# Altium PCB AT32_FOC.pcbdoc (part 1 of 2)
Units mil, origin at the board's own origin, x right, y up, seen from the top; angles counter-clockwise.
Board outline 11370.16 x 13019.92 mil, 2 copper layers (Top Layer, Bottom Layer); 154 components, 92 nets, 477 pads, 506 vias.
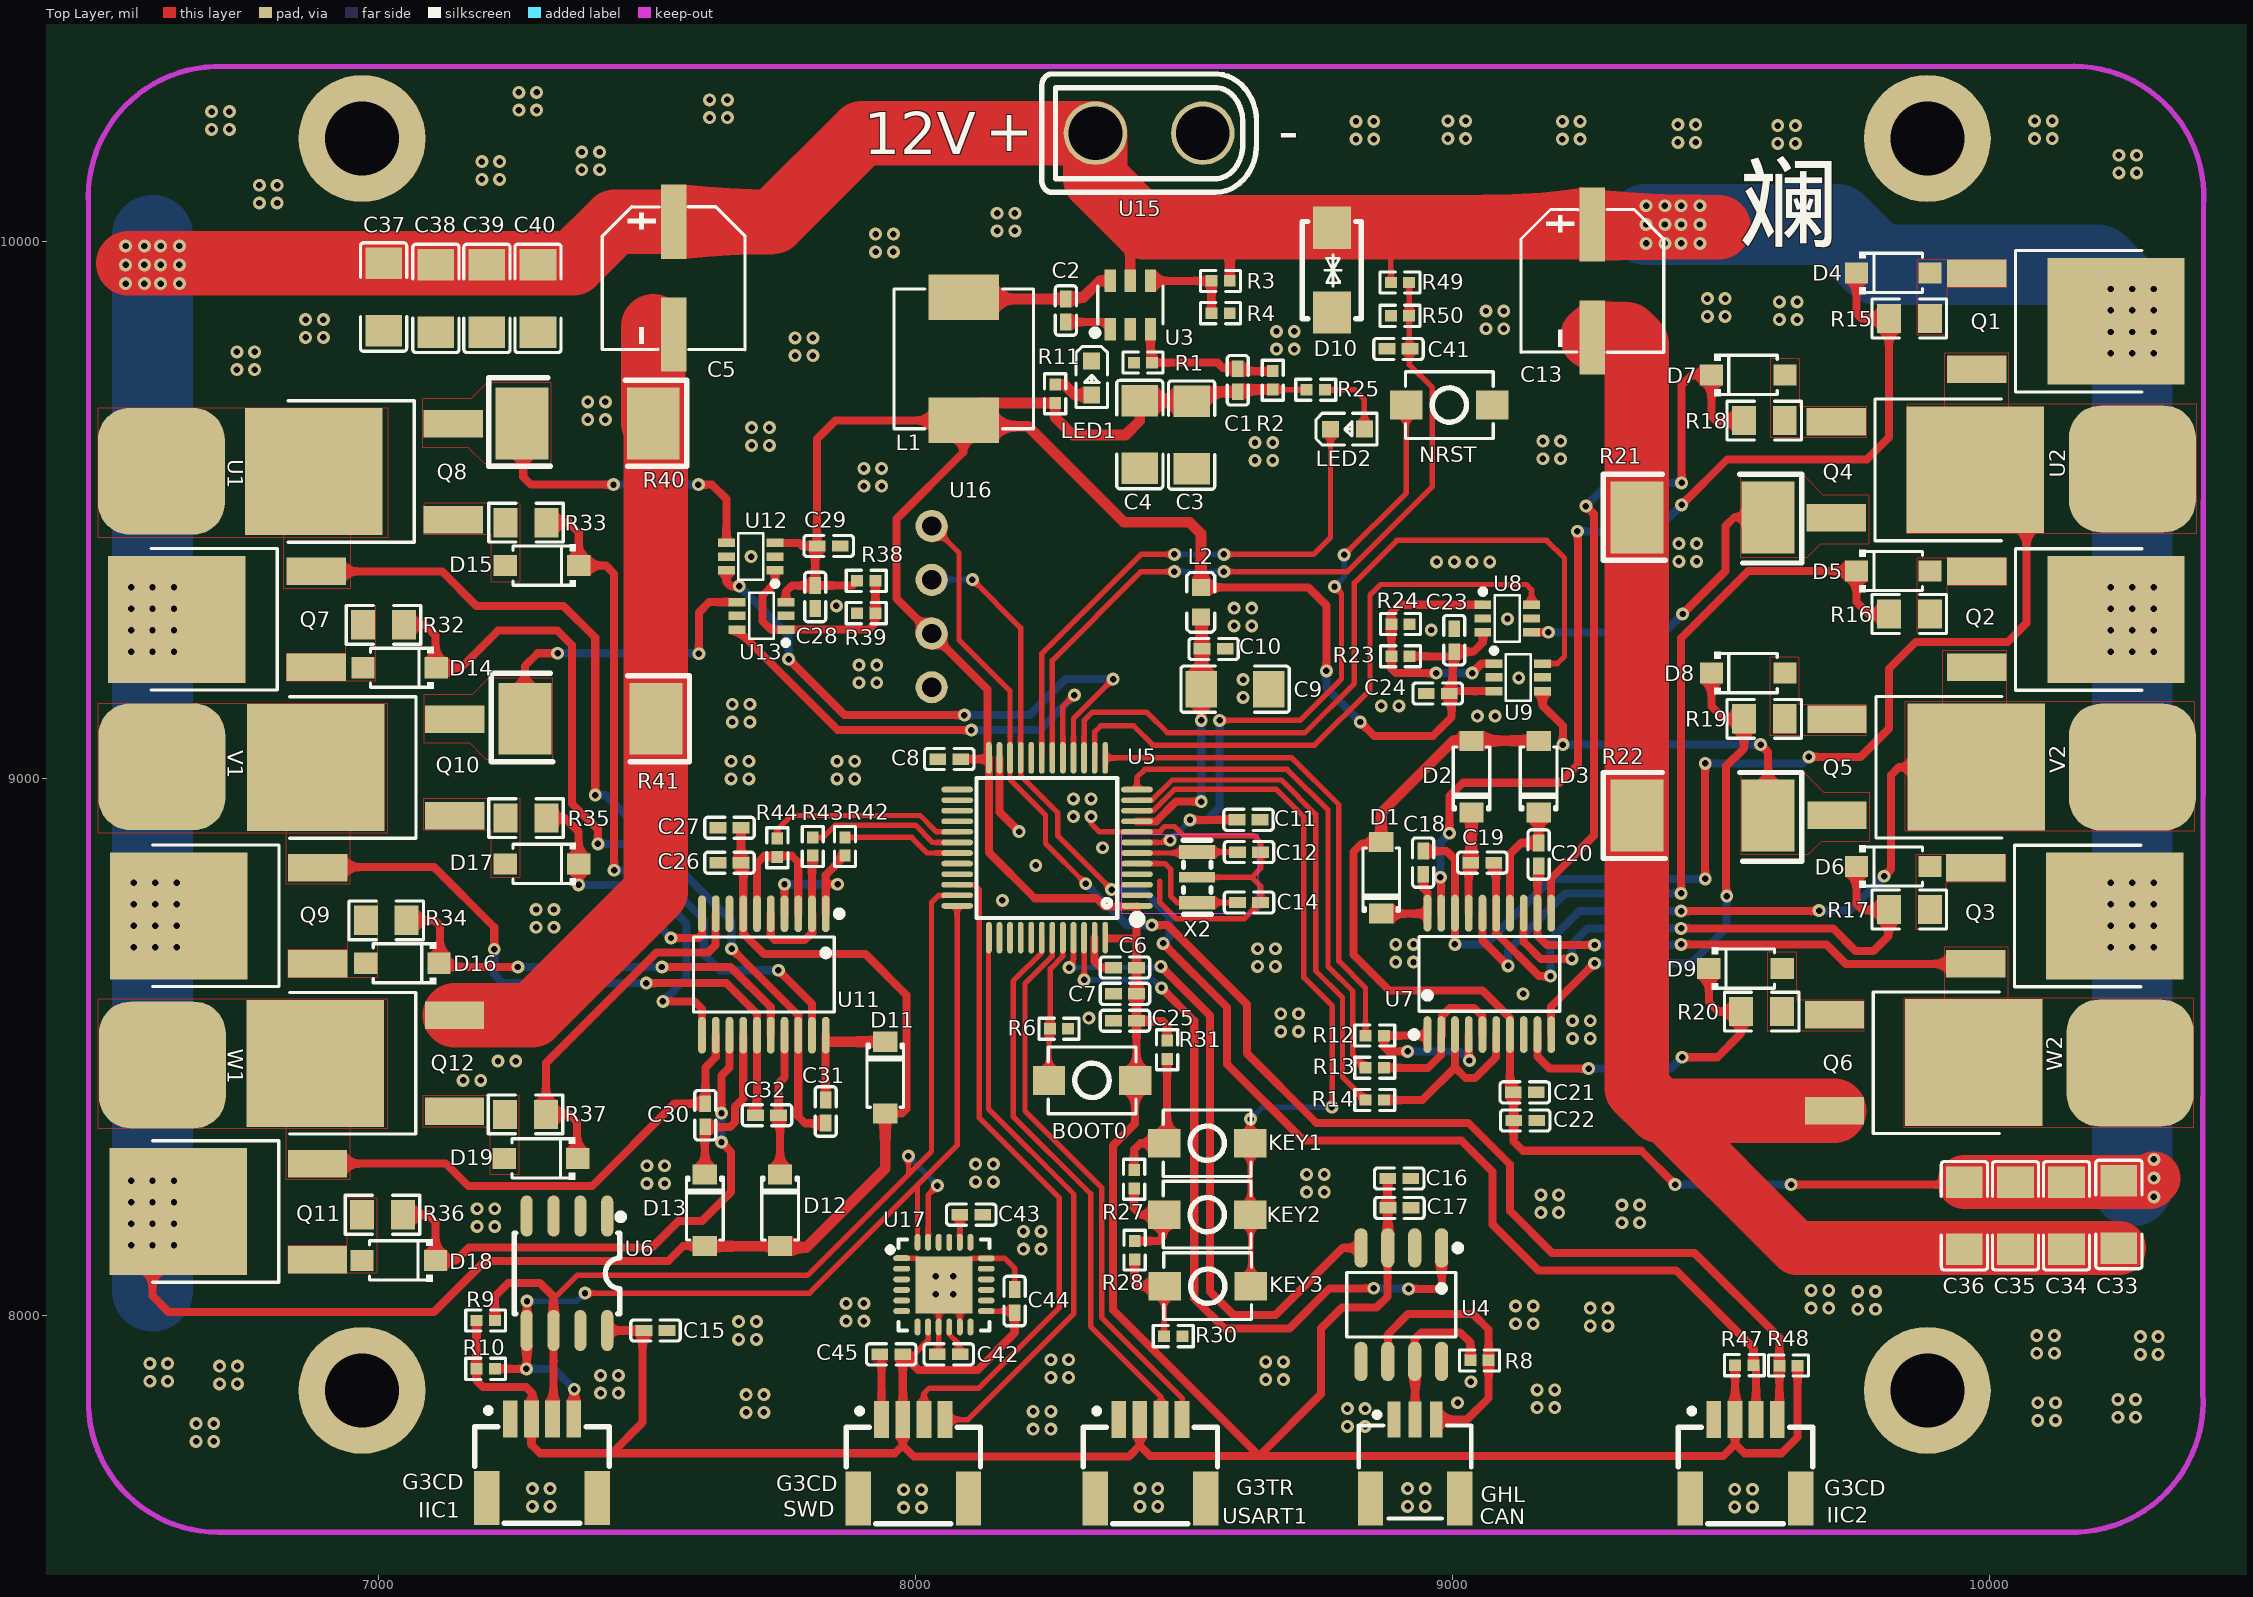
[diagram p0: Top Layer view]
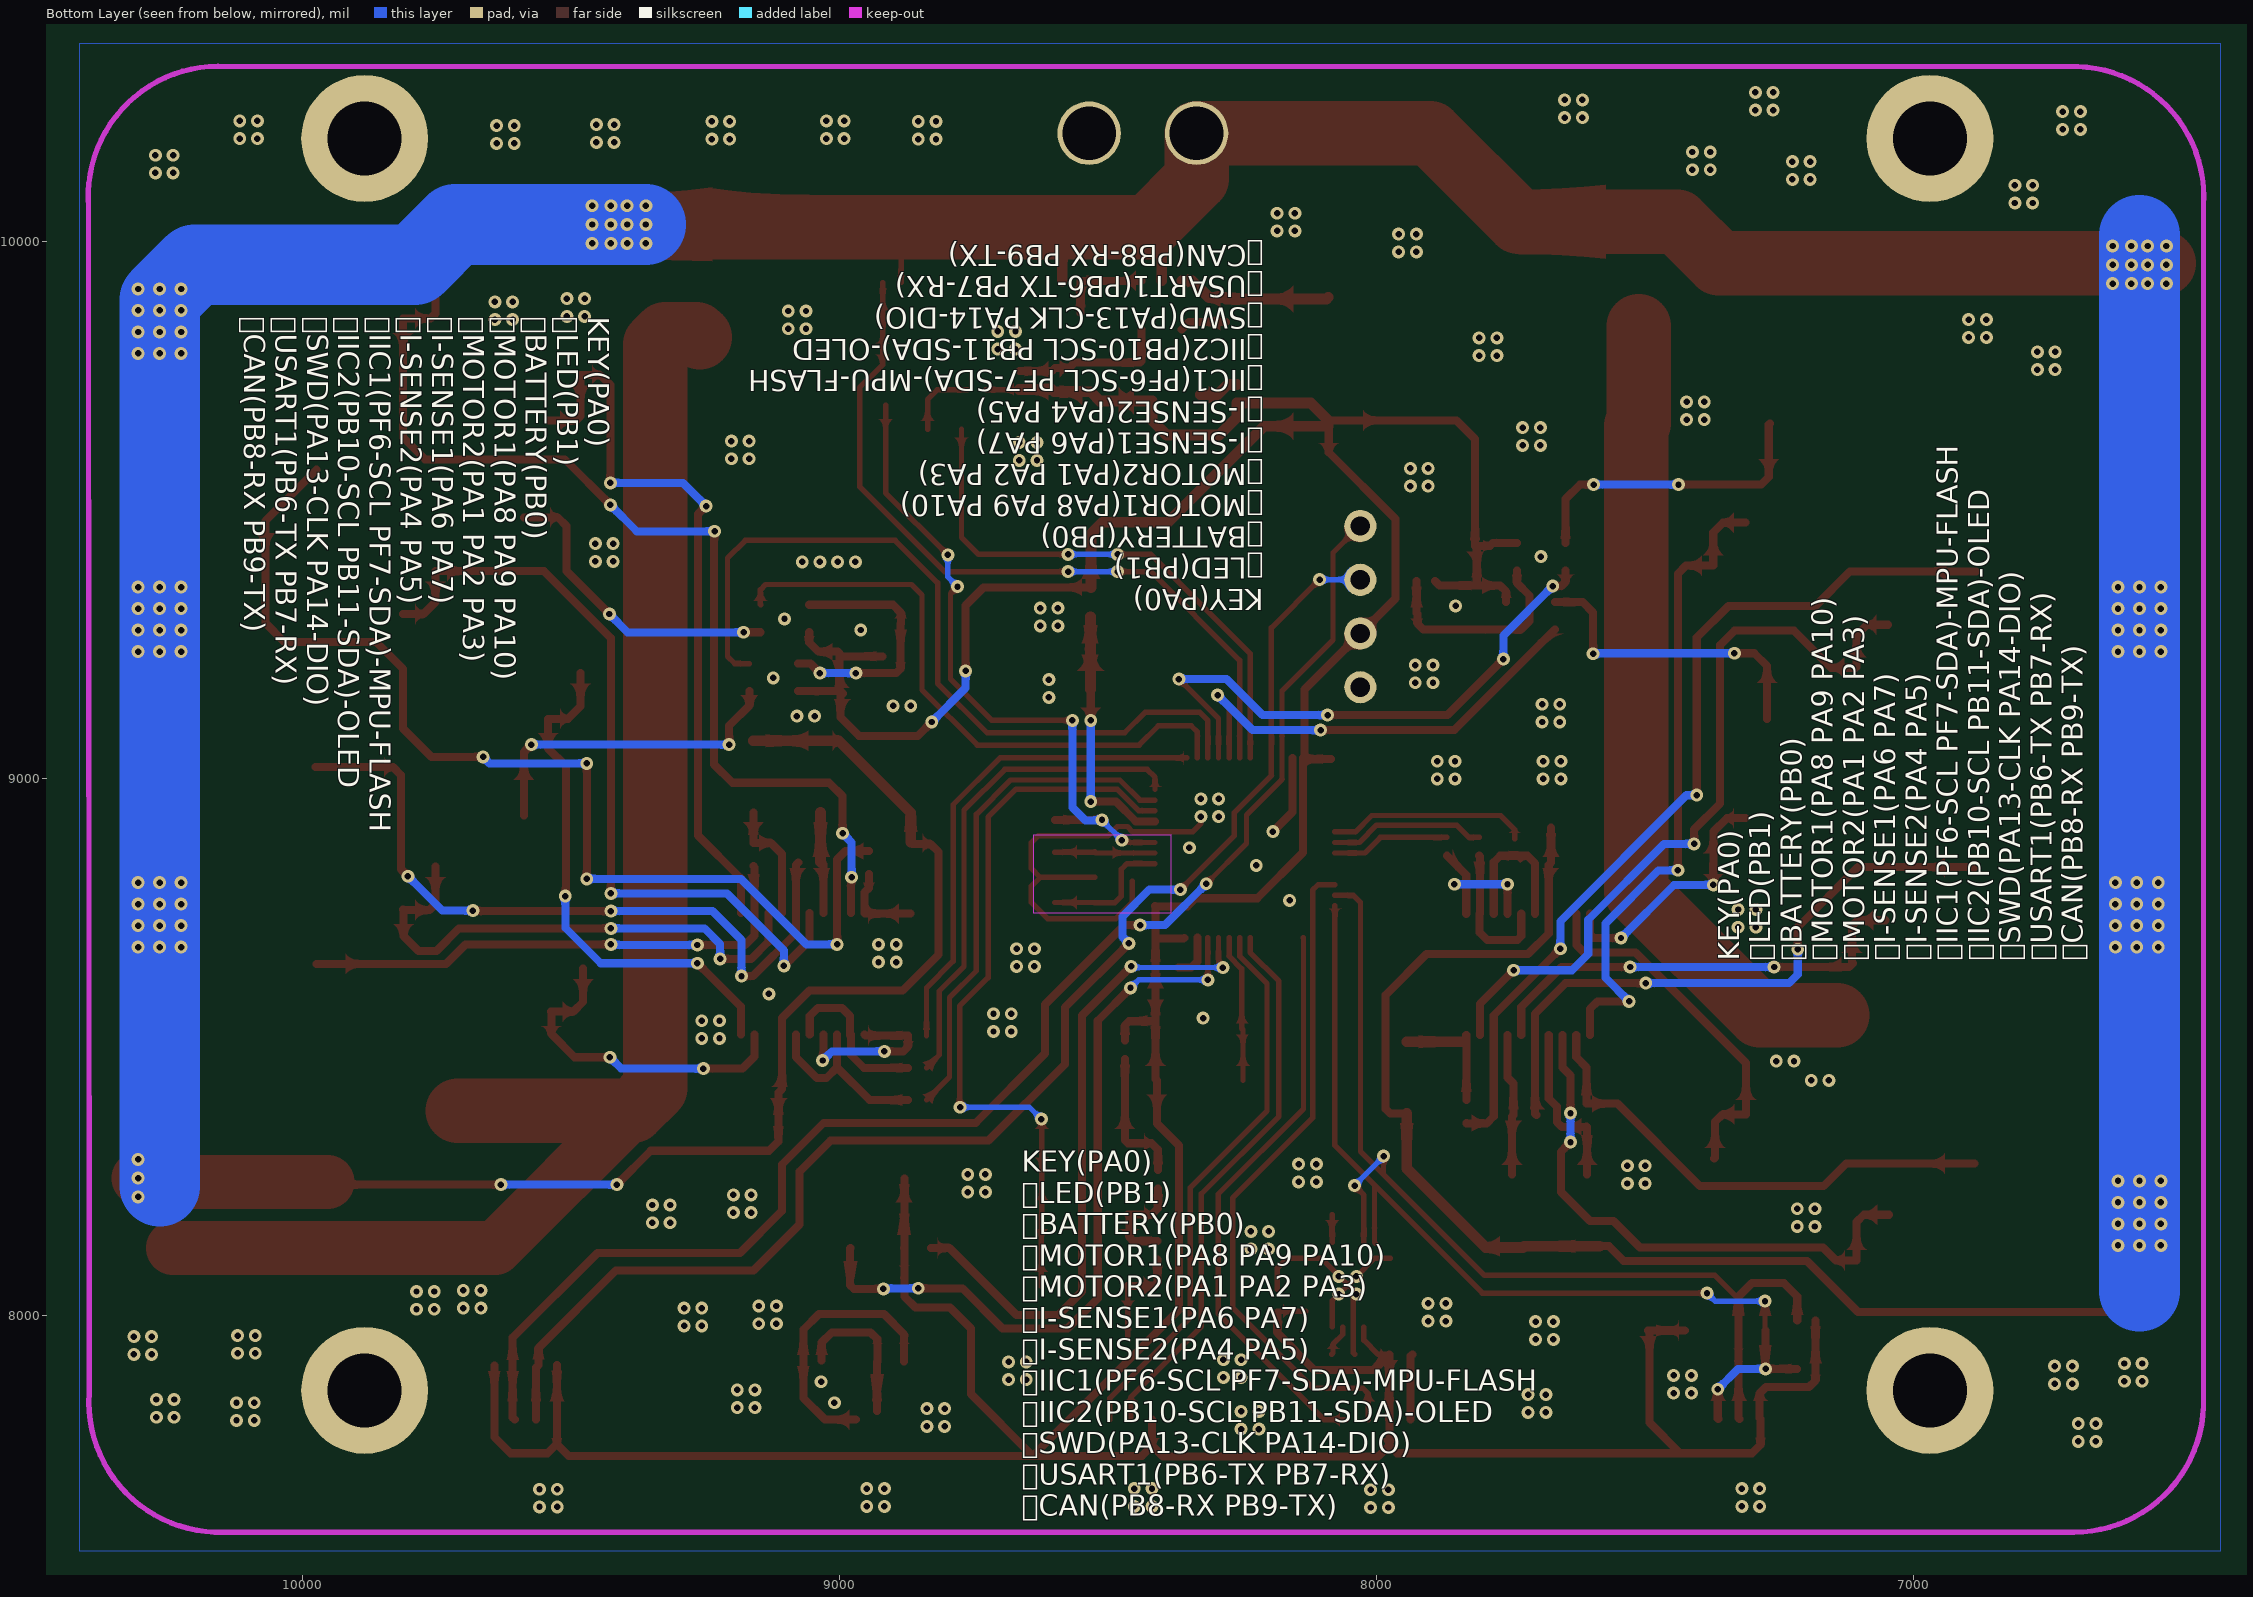
[diagram p1: Bottom Layer view, seen from below]

## Layer stack, top to bottom
Top Layer: signal copper (thickness not stored)
Dielectric: dielectric 12.6, FR-4, Dk 4.8
Bottom Layer: signal copper (thickness not stored)

## Board outline
14120.16,2750 2750,2750 2750,15769.92 14120.16,15769.92

## Components (designator, comment, footprint, x,y, rotation, side; value= is the part's Value field where it differs from the comment)
BOOT0 "K2-1807SN-A3DW-06" SW-SMD_L4.0-W2.9-LS5.0 8328.85,8437.92 r0 top
C1 "CL10C220JB8NNNC" C0402 8600.08,9740.92 r90 top
C2 "CL10B223KB8NNNC" C0402 8280.08,9870.92 r90 top
C3 "CL21A226MAQNNNE_C45783" C1206 8514.24,9638.92 r90 top
C4 "CL21A226MAQNNNE_C45783" C1206 8417.66,9639.92 r90 top
C5 "PM101M025E077PTR" CAP-SMD_BD6.3-L6.6-W6.6-LS7.2-FD 7550.08,9930.92 r270 top
C6 "0603B104K500NT" C0402 8390.08,8647.92 r0 top
C7 "0603B104K500NT" C0402 8390.08,8598.92 r0 top
C8 "0603B104K500NT" C0402 8063.08,9035.92 r0 top
C9 "CL10A106KP8NNNC" C1206 8595.08,9165.92 r180 top
C10 "0603B104K500NT" C0402 8555.08,9240.92 r180 top
C11 "0603B104K500NT" C0402 8620.08,8922.88 r180 top
C12 "CL10C220JB8NNNC" C0402 8621.08,8862.83 r0 top
C13 "PM101M025E077PTR" CAP-SMD_BD6.3-L6.6-W6.6-LS7.2-FD 9260.08,9925.92 r270 top
C14 "CL10C220JB8NNNC" C0402 8621.08,8768.92 r180 top
C15 "CC0603KRX7R9BB104" C0402 7516.28,7972.37 r0 top
C16 "CL10A106KP8NNNC" C0402 8900.55,8255.25 r180 top
C17 "0603B104K500NT" C0402 8900.97,8200.46 r180 top
C18 "CL10A105KB8NNNC" C0402 8945.08,8843.22 r270 top
C19 "CL10A105KB8NNNC" C0402 9055.08,8843.22 r180 top
C20 "CL10A105KB8NNNC" C0402 9160.08,8858.22 r90 top
C21 "CL10A105KB8NNNC" C0402 9134.28,8415.52 r180 top
C22 "CC0603KRX7R9BB104" C0402 9135.08,8363.22 r180 top
C23 "CC0603KRX7R9BB104" C0402 9002.91,9257.24 r90 top
C24 "CC0603KRX7R9BB104" C0402 8972.08,9157.92 r180 top
C25 "0603B104K500NT" C0402 8390.08,8548.92 r0 top
C26 "CL10A105KB8NNNC" C0402 7653.93,8843.09 r0 top
C27 "CC0603KRX7R9BB104" C0402 7653.93,8908.09 r0 top
C28 "CC0603KRX7R9BB104" C0402 7813.56,9337.6 r270 top
C29 "CC0603KRX7R9BB104" C0402 7838.56,9432.6 r0 top
C30 "CL10A105KB8NNNC" C0402 7608.93,8373.09 r270 top
C31 "CL10A105KB8NNNC" C0402 7833.08,8379.92 r90 top
C32 "CL10A105KB8NNNC" C0402 7723.93,8373.09 r0 top
C33 "GRM31CR61E476ME44L" C1206 10240.08,8188.42 r270 top
C34 "GRM31CR61E476ME44L" C1206 10142.58,8185.92 r270 top
C35 "GRM31CR61E476ME44L" C1206 10047.58,8185.92 r270 top
C36 "GRM31CR61E476ME44L" C1206 9952.58,8185.92 r270 top
C37 "GRM31CR61E476ME44L" C1206 7010.08,9895.92 r270 top
C38 "GRM31CR61E476ME44L" C1206 7107.58,9893.42 r270 top
C39 "GRM31CR61E476ME44L" C1206 7202.58,9893.42 r270 top
C40 "GRM31CR61E476ME44L" C1206 7297.58,9893.42 r270 top
C41 "0603B104K500NT" C0402 8899.08,9799.28 r0 top
C42 "CC0603KRX7R9BB104" C0402 8062.08,7927.92 r180 top
C43 "CC0603KRX7R9BB104" C0402 8104.08,8187.92 r180 top
C44 "CC0603KRX7R9BB104" C0402 8184.69,8027.11 r90 top
C45 "CC0603KRX7R9BB104" C0402 7955.05,7927.92 r0 top
CAN "AFC10-S03QCA-00" CONN-SMD_AFC10-S03QCA-00 8930.08,7732.92 r180 top
D1 "DSK34_C41029" SOD-123_L2.8-W1.8-LS3.7-RD 8867.18,8814.92 r90 top
D2 "DSK34_C41029" SOD-123_L2.8-W1.8-LS3.7-RD 9035.08,9003.22 r90 top
D3 "DSK34_C41029" SOD-123_L2.8-W1.8-LS3.7-RD 9160.08,9003.22 r90 top
D4 "1N4148W_C81598" SOD-123F_L2.7-W1.6-LS3.8-RD 9820.08,9940.92 r0 top
D5 "1N4148W_C81598" SOD-123F_L2.7-W1.6-LS3.8-RD 9820.08,9385.92 r0 top
D6 "1N4148W_C81598" SOD-123F_L2.7-W1.6-LS3.8-RD 9820.08,8835.92 r0 top
D7 "1N4148W_C81598" SOD-123F_L2.7-W1.6-LS3.8-RD 9550.08,9750.92 r0 top
D8 "1N4148W_C81598" SOD-123F_L2.7-W1.6-LS3.8-RD 9550.08,9195.92 r0 top
D9 "1N4148W_C81598" SOD-123F_L2.7-W1.6-LS3.8-RD 9545.08,8645.92 r0 top
D10 "SMAJ12CA/TR13" SMA_L4.4-W2.6-LS5.0-BI 8775.08,9945.92 r90 top
D11 "DSK34_C41029" SOD-123_L2.8-W1.8-LS3.7-RD 7943.93,8443.09 r270 top
D12 "DSK34_C41029" SOD-123_L2.8-W1.8-LS3.7-RD 7748.08,8195.92 r270 top
D13 "DSK34_C41029" SOD-123_L2.8-W1.8-LS3.7-RD 7608.08,8195.92 r270 top
D14 "1N4148W_C81598" SOD-123F_L2.7-W1.6-LS3.8-RD 7040.08,9205.92 r180 top
D15 "1N4148W_C81598" SOD-123F_L2.7-W1.6-LS3.8-RD 7305.08,9395.92 r180 top
D16 "1N4148W_C81598" SOD-123F_L2.7-W1.6-LS3.8-RD 7045.08,8655.92 r180 top
D17 "1N4148W_C81598" SOD-123F_L2.7-W1.6-LS3.8-RD 7305.08,8840.92 r180 top
D18 "1N4148W_C81598" SOD-123F_L2.7-W1.6-LS3.8-RD 7038.27,8102.78 r180 top
D19 "1N4148W_C81598" SOD-123F_L2.7-W1.6-LS3.8-RD 7303.27,8292.78 r180 top
IIC1 "AFC10-S04QCA-00" CONN-SMD_AFC10-S04QCA-00 7305.08,7733.92 r0 top
IIC2 "AFC10-S04QCA-00" CONN-SMD_AFC10-S04QCA-00 9545.08,7732.92 r0 top
KEY1 "K2-1807SN-A3DW-06" SW-SMD_L4.0-W2.9-LS5.0 8543.08,8320.92 r180 top
KEY2 "K2-1807SN-A3DW-06" SW-SMD_L4.0-W2.9-LS5.0 8543.08,8187.92 r180 top
KEY3 "K2-1807SN-A3DW-06" SW-SMD_L4.0-W2.9-LS5.0 8544.08,8054.92 r180 top
L1 "0630 6.8uH" IND-SMD_L7.1-W6.6 8090.08,9780.92 r270 top
L2 "CMH160808B3R3MT" L0603 8531.61,9327.92 r90 top
LED1 "XL-1608UBC-04" LED0603-RD_BLUE 8328.08,9745.3 r270 top
LED2 "XL-1608UBC-04" LED0603-RD_BLUE 8804.21,9649.92 r0 top
NRST "K2-1807SN-A3DW-06" SW-SMD_L4.0-W2.9-LS5.0 8993.85,9694.92 r0 top
Q1 "NCE3080K" TO-252-2_L6.6-W6.1-P4.57-LS9.9-TL-CW 10105.08,9850.92 r0 top
Q2 "NCE3080K" TO-252-2_L6.6-W6.1-P4.57-LS9.9-TL-CW 10105.08,9295.92 r0 top
Q3 "NCE3080K" TO-252-2_L6.6-W6.1-P4.57-LS9.9-TL-CW 10103.08,8744.16 r0 top
Q4 "NCE3080K" TO-252-2_L6.6-W6.1-P4.57-LS9.9-TL-CW 9843.41,9574.47 r0 top
Q5 "NCE3080K" TO-252-2_L6.6-W6.1-P4.57-LS9.9-TL-CW 9845.08,9020.92 r0 top
Q6 "NCE3080K" TO-252-2_L6.6-W6.1-P4.57-LS9.9-TL-CW 9840.08,8470.92 r0 top
Q7 "NCE3080K" TO-252-2_L6.6-W6.1-P4.57-LS9.9-TL-CW 6755.08,9295.92 r180 top
Q8 "NCE3080K" TO-252-2_L6.6-W6.1-P4.57-LS9.9-TL-CW 7010.08,9570.92 r180 top
Q9 "NCE3080K" TO-252-2_L6.6-W6.1-P4.57-LS9.9-TL-CW 6758.1,8744.22 r180 top
Q10 "NCE3080K" TO-252-2_L6.6-W6.1-P4.57-LS9.9-TL-CW 7013.1,9020.12 r180 top
Q11 "NCE3080K" TO-252-2_L6.6-W6.1-P4.57-LS9.9-TL-CW 6757.68,8193.64 r180 top
Q12 "NCE3080K" TO-252-2_L6.6-W6.1-P4.57-LS9.9-TL-CW 7012.68,8469.54 r180 top
R1 "={Value}" R0402 8423.5,9773.92 r180 top
R2 "0603WAF1003T5E" R0402 8665.08,9740.92 r90 top
R3 "0603WAF2002T5E" R0402 8568.08,9925.92 r0 top
R4 "0603WAF1002T5E" R0402 8568.08,9865.92 r180 top
R6 "0603WAF1002T5E" R0402 8267.22,8533.92 r180 top
R8 "0603WAF1200T5E" R0402 9050.08,7916.66 r0 top
R9 "0603WAF1002T5E" R0402 7200.08,7990.92 r180 top
R10 "0603WAF1002T5E" R0402 7200.08,7900.92 r180 top
R11 "0603WAF5101T5E" R0402 8260.08,9715.92 r90 top
R12 "={Value}" R0402 8854.89,8521.31 r0 top
R13 "={Value}" R0402 8854.89,8461.31 r0 top
R14 "={Value}" R0402 8854.89,8401.31 r0 top
R15 "0805W8F100JT5E" R0805_NEW 9850.08,9855.92 r0 top
R16 "0805W8F100JT5E" R0805_NEW 9850.08,9305.92 r0 top
R17 "0805W8F100JT5E" R0805_NEW 9850.08,8755.92 r0 top
R18 "0805W8F100JT5E" R0805_NEW 9580.08,9665.92 r0 top
R19 "0805W8F100JT5E" R0805_NEW 9580.08,9110.92 r0 top
R20 "0805W8F100JT5E" R0805_NEW 9575.08,8565.92 r0 top
R21 "RLP25FEER005" RES-SMD_L6.4-W3.2-1 9465.08,9485.92 r0 top
R22 "RLP25FEER005" RES-SMD_L6.4-W3.2-1 9465.08,8930.92 r0 top
R23 "0603WAF1001T5E" R0402 8902.91,9227.24 r180 top
R24 "0603WAF1001T5E" R0402 8902.91,9287.24 r0 top
R25 "0603WAF5101T5E" R0402 8745.08,9723.38 r0 top
R27 "0603WAF1002T5E" R0402 8407.08,8253.92 r90 top
R28 "0603WAF1002T5E" R0402 8408.08,8121.92 r90 top
R30 "0603WAF1002T5E" R0402 8480.08,7961.92 r180 top
R31 "0603WAF1002T5E" R0402 8468.52,8494.92 r90 top
R32 "0805W8F100JT5E" R0805_NEW 7010.08,9285.92 r180 top
R33 "0805W8F100JT5E" R0805_NEW 7275.08,9475.92 r180 top
R34 "0805W8F100JT5E" R0805_NEW 7015.08,8735.92 r180 top
R35 "0805W8F100JT5E" R0805_NEW 7275.08,8925.92 r180 top
R36 "0805W8F100JT5E" R0805_NEW 7008.27,8187.78 r180 top
R37 "0805W8F100JT5E" R0805_NEW 7274.42,8374.54 r180 top
R38 "0603WAF1001T5E" R0402 7908.56,9367.6 r0 top
R39 "0603WAF1001T5E" R0402 7908.56,9307.6 r180 top
R40 "RLP25FEER005" RES-SMD_L6.4-W3.2-1 7390.08,9660.92 r180 top
R41 "RLP25FEER005" RES-SMD_L6.4-W3.2-1 7395.08,9110.92 r180 top
R42 "={Value}" R0402 7868.93,8873.09 r270 top
R43 "={Value}" R0402 7808.93,8873.09 r270 top
R44 "={Value}" R0402 7743.08,8870.92 r270 top
R47 "0603WAF1002T5E" R0402 9542.92,7907.92 r180 top
R48 "0603WAF1002T5E" R0402 9625.18,7907.13 r0 top
R49 "0603WAF5101T5E" R0402 8902.08,9922.92 r0 top
R50 "0603WAF5101T5E" R0402 8902.08,9860.92 r180 top
SWD "AFC10-S04QCA-00" CONN-SMD_AFC10-S04QCA-00 7996.08,7732.92 r0 top
U1 "PAD" PAD-1.5 6596.54,9571.61 r270 top
U2 "PAD" PAD-1.5 10265.08,9575.92 r270 top
U3 "MT2492" SOT-23-6_L2.9-W1.6-P0.95-LS2.8-BL 8400.08,9880.92 r0 top
U4 "SIT65HVD230DR" SOP-8_L4.9-W3.9-P1.27-LS6.0-BL 8904.39,8020.4 r180 top
U5 "AT32F415CBT7_C528427" LQFP-48_L7.0-W7.0-P0.50-LS9.0-BL 8245.08,8870.92 r90 top
U6 "AT24C02C-SSHM-T" SOIC-8_L5.0-W4.0-P1.27-LS6.0-BL 7351.45,8078.87 r180 top
U7 "EG2133_C190343" TSSOP-20_L6.5-W4.4-P0.65-LS6.4-BL 9068.23,8636.19 r0 top
U8 "TP181A1-CR" SC70-6_L2.1-W1.3-P0.65-LS2.3-BL 9101.31,9297.57 r270 top
U9 "TP181A1-CR" SC70-6_L2.1-W1.3-P0.65-LS2.3-BL 9122.08,9187.92 r270 top
U11 "EG2133_C190343" TSSOP-20_L6.5-W4.4-P0.65-LS6.4-BL 7718,8635.04 r180 top
U12 "TP181A1-CR" SC70-6_L2.1-W1.3-P0.65-LS2.3-BL 7693.56,9412.6 r90 top
U13 "TP181A1-CR" SC70-6_L2.1-W1.3-P0.65-LS2.3-BL 7713.56,9302.6 r90 top
U15 "XT30" XT-30 8435.08,10200.92 r0 top
U16 "0.91OLED-4P-IIC模块" OLED-0.91-2.54*4P-IIC 8691.38,9360.92 r0 top
U17 "MPU-6050" QFN-24_L4.0-W4.0-P0.50-BL-EP2.7 8053.2,8057.7 r270 top
USART1 "AFC10-S04QCA-00" CONN-SMD_AFC10-S04QCA-00 8437.4,7732.92 r0 top
V1 "PAD" PAD-1.5 6597.44,9021.61 r90 top
V2 "PAD" PAD-1.5 10265.08,9020.92 r270 top
W1 "PAD" PAD-1.5 6598.35,8466.61 r270 top
W2 "PAD" PAD-1.5 10261.09,8470.25 r90 top
X2 "CSTCE8M00G52-R0" OSC-SMD_3P-L3.2-W1.3-P1.2-L 8524.53,8815.92 r90 top

## Footprints (in the part's own frame and the unit in brackets; to place one, negate y for a bottom-side part, rotate by r counter-clockwise, add the part's x,y. Pads: shape width x height; smd on the part's side, far side on the other; paste and mask are expansions set on the pad)
C0402 [mm]
  rect 0.79x0.54 smd: 1(-0.545,0) 2(0.545,0)
  silkscreen extent -1.17,-0.5 1.17,0.5
C1206 [mm]
  rect 1.485x1.728 smd: 1(-1.593,0) 2(1.593,0)
  silkscreen extent -2.56,-1.09 2.56,1.09
CAP-SMD_BD6.3-L6.6-W6.6-LS7.2-FD [mm]
  rect 3.5x1.2 smd: 1(-2.67,0) 2(2.67,0)
  silkscreen extent -3.38,-3.38 3.38,3.38
CONN-SMD_AFC10-S03QCA-00 [mm]
  rect 0.6x1.71 smd: 1(1,-1.87) 2(0,-1.87) 3(-1,-1.87)
  rect 1.2x2.55 smd: 4(-2.11,1.87) 5(2.11,1.87)
  silkscreen extent -2.66,-2.22 2.66,2.81
CONN-SMD_AFC10-S04QCA-00 [mm]
  rect 0.7x1.75 smd: 1(-1.5,1.87) 2(-0.5,1.87) 3(0.5,1.87) 4(1.5,1.87)
  rect 1.2x2.55 smd: 5(-2.61,-1.87) 6(2.61,-1.87)
  silkscreen extent -3.18,-3.06 3.17,2.4
IND-SMD_L7.1-W6.6 [mm]
  rect 2.15x3.32 smd: 1(-2.913,0) 2(2.913,0)
  silkscreen extent -3.3,-3.3 3.3,3.3
L0603 [mm]
  rect 0.8x0.864 smd: 1(-0.7,0) 2(0.7,0)
  silkscreen extent -1.42,-0.65 1.41,0.67
LED0603-RD_BLUE [mm]
  rect 0.8x0.8 smd: 1(-0.8,-0.004) 2(0.799,0.004)
  silkscreen extent -1.49,-0.75 1.39,0.76
LQFP-48_L7.0-W7.0-P0.50-LS9.0-BL [mm]
  oval 0.27x1.5 smd: 1(-2.75,-4.25) 2(-2.25,-4.25) 3(-1.75,-4.25) 4(-1.25,-4.25) 5(-0.75,-4.25) 6(-0.25,-4.25) 7(0.25,-4.25) 8(0.75,-4.25) 9(1.25,-4.25) 10(1.75,-4.25) 11(2.25,-4.25) 12(2.75,-4.25) 25(2.75,4.25) 26(2.25,4.25) 27(1.75,4.25) 28(1.25,4.25) 29(0.75,4.25) 30(0.25,4.25) 31(-0.25,4.25) 32(-0.75,4.25) 33(-1.25,4.25) 34(-1.75,4.25) 35(-2.25,4.25) 36(-2.75,4.25)
  oval 1.5x0.27 smd: 13(4.25,-2.75) 14(4.25,-2.25) 15(4.25,-1.75) 16(4.25,-1.25) 17(4.25,-0.75) 18(4.25,-0.25) 19(4.25,0.25) 20(4.25,0.75) 21(4.25,1.25) 22(4.25,1.75) 23(4.25,2.25) 24(4.25,2.75) 37(-4.25,2.75) 38(-4.25,2.25) 39(-4.25,1.75) 40(-4.25,1.25) 41(-4.25,0.75) 42(-4.25,0.25) 43(-4.25,-0.25) 44(-4.25,-0.75) 45(-4.25,-1.25) 46(-4.25,-1.75) 47(-4.25,-2.25) 48(-4.25,-2.75)
  silkscreen extent -3.59,-4.46 3.3,3.34
OLED-0.91-2.54*4P-IIC [mil]
  round 60 hole 35.8: 1(-661.1,-191.3) 2(-661.1,-91.3) 3(-661.1,8.7) 4(-661.1,108.7)
OSC-SMD_3P-L3.2-W1.3-P1.2-L [mm]
  rect 0.65x1.7 smd: 1(-1.2,0) 3(1.2,0)
  rect 0.5x1.7 smd: 2(0,0)
  silkscreen extent -1.75,-0.66 1.75,0.66
PAD-1.5 [mm]
  rrect50% 6x6 smd: 1(0,0)
QFN-24_L4.0-W4.0-P0.50-BL-EP2.7 [mm]
  oval 0.28x0.8 smd: 1(-1.25,-2) 2(-0.75,-2) 3(-0.25,-2) 4(0.25,-2) 5(0.75,-2) 6(1.25,-2) 13(1.25,2) 14(0.75,2) 15(0.25,2) 16(-0.25,2) 17(-0.75,2) 18(-1.242,2)
  oval 0.8x0.28 smd: 7(2,-1.25) 8(2,-0.75) 9(2,-0.25) 10(2,0.25) 11(2,0.75) 12(2,1.25) 19(-2,1.25) 20(-2,0.75) 21(-2,0.25) 22(-2,-0.25) 23(-2,-0.75) 24(-2,-1.25)
  rect 2.7x2.7 smd: 25(0.012,0)
  silkscreen extent -2.14,-2.79 2.16,2.15
R0402 [mm]
  rect 0.566x0.54 smd: 1(-0.433,0) 2(0.433,0)
  silkscreen extent -0.94,-0.5 0.94,0.5
R0805_NEW [mil]
  rect 44.59x54.21 smd: 1(-38.04,0) 2(38.04,0)
  silkscreen extent -69,-36 69,36
RES-SMD_L6.4-W3.2-1 [mm]
  rect 2.5x3.4 smd: 1(-3.1,0) 2(3.1,0)
  silkscreen extent -4.69,-2.16 4.69,2.03
SC70-6_L2.1-W1.3-P0.65-LS2.3-BL [mm]
  rect 0.4x0.8 smd: 1(-0.65,-1.15) 2(0,-1.15) 3(0.65,-1.15) 4(0.65,1.15) 5(0,1.15) 6(-0.65,1.15)
  silkscreen extent -1.4,-1.27 1.1,0.59
SMA_L4.4-W2.6-LS5.0-BI [mm]
  rect 2x1.8 smd: 1(-2,0) 2(2,0)
  silkscreen extent -2.3,-1.4 2.3,1.4
SOD-123_L2.8-W1.8-LS3.7-RD [mm]
  rect 0.95x1.15 smd: 1(-1.692,0) 2(1.692,0)
  silkscreen extent -1.58,-0.87 1.41,0.87
SOD-123F_L2.7-W1.6-LS3.8-RD [mm]
  rect 1.1x1 smd: 1(-1.735,0) 2(1.735,0)
  silkscreen extent -1.6,-1 1.38,1
SOIC-8_L5.0-W4.0-P1.27-LS6.0-BL [mil]
  oval 22.38x76.78 smd: 1(-75,-106.5) 2(-25,-106.5) 3(25,-106.5) 4(75,-106.5) 5(75,106.5) 6(25,106.5) 7(-25,106.5) 8(-75,106.5)
  silkscreen extent -106,-111 98,75
SOP-8_L4.9-W3.9-P1.27-LS6.0-BL [mm]
  oval 0.63x1.865 smd: 1(-1.905,-2.682) 2(-0.635,-2.682) 3(0.635,-2.682) 4(1.905,-2.682) 5(1.905,2.682) 6(0.635,2.682) 7(-0.635,2.682) 8(-1.905,2.682)
  silkscreen extent -2.82,-2.83 2.58,1.52
SOT-23-6_L2.9-W1.6-P0.95-LS2.8-BL [mil]
  rect 20.95x42.2 smd: 1(-37.4,-45.24) 2(0,-45.24) 3(37.4,-45.24) 4(37.4,45.24) 5(0,45.24) 6(-37.4,45.24)
  silkscreen extent -72,-57 61,35
SW-SMD_L4.0-W2.9-LS5.0 [mm]
  rect 1.53x1.36 smd: 1(-2.035,0) 2(2.035,0)
  silkscreen extent -2.08,-1.58 2.08,1.58
TO-252-2_L6.6-W6.1-P4.57-LS9.9-TL-CW [mm]
  rect 2.8x1.3 smd: 1(-3.292,2.273) 3(-3.292,-2.273)
  rect 6.5x6 smd: 2(3.292,0)
  silkscreen extent -1.46,-3.35 4.51,3.34
TSSOP-20_L6.5-W4.4-P0.65-LS6.4-BL [mil]
  oval 14.33x68.58 smd: 1(-115.16,-113.03) 2(-89.57,-113.03) 3(-63.98,-113.03) 4(-38.39,-113.03) 5(-12.79,-113.03) 6(12.8,-113.03) 7(38.39,-113.03) 8(63.98,-113.03) 9(89.57,-113.03) 10(115.16,-113.03) 11(115.16,113.03) 12(89.57,113.03) 13(63.98,113.03) 14(38.39,113.03) 15(12.8,113.03) 16(-12.79,113.03) 17(-38.39,113.03) 18(-63.98,113.03) 19(-89.57,113.03) 20(-115.16,113.03)
  silkscreen extent -146,-119 131,70
XT-30 [mm]
  round 3 hole 2.54: 1(-2.54,0) 2(2.54,0)
  silkscreen extent -5.07,-2.8 5.07,2.8

## Free pads (board coordinates)
  round 236.22 hole 137.8: 1(6970.08,7860.92) 1(6970.08,10190.92)
  round 236.22 hole 137.8 copper offset -0.01,0: 1(9883.47,7860.92)
  round 236.22 hole 137.8 copper offset -0.01,0.01: 1(9883.47,10190.91)

## Via types
v1: diameter 24.02, hole 12.01, Top Layer to Bottom Layer, 506 vias

## Nets (pads, with @x,y where several pads share a name; then routed paths per layer and width w, separated by ;. In a path a pad name is that pad's centre, name@x,y a point inside that pad or via, vN(x,y) a via of type N, cw(c..) or ccw(c..) an arc to the next point about the centre after c; other vN are vias at no path point)
3V3: BOOT0.2 C1.1 C3.2 C4.2 C6.2 C7.2 C8.2 C15.1 C16.2 C17.2 C23.1 C24.1 C25.2 C28.1 C29.1 C44.1 C45.2 IIC1.2 IIC2.2 L1.2 L2.2 R2.1 R9.2 R10.2 R11.1 R23.1 R25.1 R31.2 R38.1 R47.2 R48.2 SWD.2 U4.3 U5.1 U5.24 U5.48 U6.8 U8.3 U9.3 U12.3 U13.3 U16.2 U17.8 U17.13 USART1.2 | length 10476
  Top Layer w10: C45.2@7976.51,7927.92 7997.08,7927.92 8023.67,7954.52 U17.8@8023.67,7978.96 ; U17.13@8131.94,8008.49 8181.85,8008.49 C44.1@8184.69,8005.65 ; R2.1@8665.08,9723.88 8665.58,9723.38 R25.1@8728.04,9723.38
  Top Layer w15: R9.2@7183.04,7990.92 R10.2@7183.04,7900.92 7183.04,7878.96 7195.08,7866.92 7275.08,7866.92 7287.08,7854.92 7287.08,7809.23 IIC1.2@7285.39,7807.55 7285.39,7759.61 7301.08,7743.92 7435.08,7743.92 ; U6.8@7426.45,7972.37 C15.1@7494.82,7972.37 7492.08,7969.63 7492.08,7800.92 7435.08,7743.92 ; U12.3@7738.84,9438.19 7783.81,9438.19 7789.08,9432.92 C29.1@7816.79,9432.92 ; U13.3@7758.84,9328.19 7758.84,9347.68 7770.08,9358.92 7813.42,9358.92 C28.1@7813.56,9359.07 ; R38.1@7891.52,9367.6 7882.98,9359.07 C28.1@7813.56,9359.07 ; C8.2@8084.54,9035.92 U5.24@8134.49,9035.92 ; C44.1@8184.69,8005.65 8184.69,7967.53 8116.08,7898.92 8005.51,7898.92 C45.2@7976.51,7927.92 7976.51,7806.67 SWD.2@7976.39,7806.55 7976.39,7758.61 ; U5.48@8358.08,8703.31 8359.08,8702.31 8411.54,8702.31 ; 8411.54,8756.92 8411.54,8702.31 ; U5.1@8412.4,8762.65 8411.67,8761.92 8351.92,8761.92 8336.92,8776.92 8222.08,8776.92 8136.81,8862.19 U5.24@8136.81,9038.24 U5.24@8134.49,9035.92 ; USART1.2@8417.71,7806.55 8417.71,7758.29 ; R31.2@8468.52,8511.96 8468.52,8540.48 8461.08,8547.92 8412.54,8547.92 C25.2@8411.54,8548.92 ; L2.2@8531.61,9355.48 8731.52,9355.48 8765.08,9321.92 v1(8765.08,9199.92) ; v1(8828.08,9104.92) 8854.08,9078.92 8963.08,9078.92 8997.95,9113.79 C24.1@8997.95,9162.33 ; C16.2@8879.09,8255.25 U4.3@8879.09,8126.3 ; U4.3@8879.39,8126.01 U4.3@8879.09,8126.3 ; R23.1@8919.95,9227.24 8994.37,9227.24 C23.1@9000.08,9232.95 ; C24.1@8993.54,9157.92 C24.1@8997.95,9162.33 ; U8.3@9056.04,9271.98 9056.04,9252.88 9038.94,9235.78 C23.1@9002.91,9235.78 C23.1@9000.08,9232.95 ; U9.3@9076.81,9162.33 C24.1@8997.95,9162.33 ; IIC2.2@9525.39,7806.55 IIC2.2@9525.88,7807.03 ; R47.2@9525.88,7907.92 IIC2.2@9525.88,7807.03 ; R48.2@9642.22,7907.13 9642.22,7774.06 9612.08,7743.92 9543.08,7743.92 9525.88,7761.12 ; 7435.08,7743.92 7961.7,7743.92 7976.39,7758.61 ; C28.1@7813.56,9359.07 7813.56,9429.07 C29.1@7817.1,9432.6 C29.1@7816.79,9432.92 ; C29.1@7816.79,9432.92 7816.79,9631.63 7851.4,9666.24 L1.2@8090.08,9666.24 8089.08,9665.24 8089.08,9606.92 7965.08,9482.92 7965.08,9334.82 U16.2@8030.28,9269.62 8134.49,9165.41 U5.24@8134.49,9035.92 ; 7976.39,7758.61 7997.08,7737.92 8397.34,7737.92 8417.71,7758.29 ; C25.2@8411.54,8548.92 C7.2@8411.54,8598.92 C6.2@8411.54,8647.92 8411.54,8702.31 ; C25.2@8411.54,8548.92 8411.54,8440.49 BOOT0.2@8408.97,8437.92 8408.97,8357.82 8368.08,8316.92 8368.08,8010.92 8640.08,7738.92 ; 8417.71,7758.29 8437.08,7738.92 8640.08,7738.92 ; 8640.08,7738.92 9503.68,7738.92 9525.88,7761.12 ; 8640.08,7738.92 8755.08,7853.92 8755.08,7975.92 8794.08,8014.92 8858.08,8014.92 8879.09,8035.94 U4.3@8879.09,8126.3 ; C24.1@8997.95,9162.33 9000.08,9164.46 C23.1@9000.08,9232.95 ; 9525.88,7761.12 IIC2.2@9525.88,7807.03
  Top Layer w20: L2.2@8531.61,9355.48 8531.61,9455.39 8510.08,9476.92 8388.08,9476.92 8209.59,9655.41 8090.08,9655.41 L1.2@8090.08,9666.24 8122.72,9698.88 R11.1@8260.08,9698.88 8260.08,9671.92 8293.08,9638.92 8391.08,9638.92 8417.66,9665.5 C4.2@8417.66,9702.62 8513.24,9702.62 C3.2@8514.24,9701.62 8532.08,9719.46 C1.1@8600.08,9719.46 8604.5,9723.88 R2.1@8665.08,9723.88
  Bottom Layer w15: v1(8765.08,9199.92) 8765.08,9167.92 v1(8828.08,9104.92)
3V3EN: R3.1 R4.2 U3.4 | length 174
  Top Layer w15: U3.4@8437.48,9926.16 8502.8,9926.16 ; 8503.04,9925.92 8502.8,9926.16 ; R4.2@8551.04,9865.92 R3.1@8551.04,9925.92 8550.8,9926.16 8502.8,9926.16
$1N6913: LED1.2 R11.2 | length 76.1
  Top Layer w20: R11.2@8260.08,9732.96 8277.04,9732.96 8296.17,9713.83 LED1.2@8328.22,9713.83
$1N15344: LED2.2 R25.2 | length 136.3
  Top Layer w10: R25.2@8762.12,9723.38 8817.62,9723.38 8835.68,9705.32 LED2.2@8835.68,9650.06
$1N20985: KEY1.2 R27.2 R31.1 | length 258.1
  Top Layer w15: R27.2@8407.08,8270.96 8407.08,8308.92 8419.08,8320.92 KEY1.2@8462.96,8320.92 8468.52,8326.48 R31.1@8468.52,8477.88
$1N20991: KEY2.2 R27.1 R28.2 | length 195.9
  Top Layer w15: R27.1@8407.08,8236.88 8407.08,8199.92 8419.08,8187.92 KEY2.2@8462.96,8187.92 8460.08,8185.04 8460.08,8145.92 8453.12,8138.96 R28.2@8408.08,8138.96
$1N21003: KEY3.2 R28.1 R30.2 | length 195.1
  Top Layer w10: R30.2@8463.04,7961.92 8463.04,8054 KEY3.2@8463.96,8054.92
  Top Layer w15: R28.1@8408.08,8104.88 8408.08,8061.92 8415.08,8054.92 KEY3.2@8463.96,8054.92
$1N40980: C42.1 U17.10 | length 59.5
  Top Layer w10: U17.10@8063.04,7978.96 8063.04,7964.96 8081.08,7946.92 8081.08,7930.38 C42.1@8083.54,7927.92
$1N41089: C43.2 U17.20 | length 51.5
  Top Layer w10: C43.2@8082.62,8187.92 8082.73,8187.81 U17.20@8082.73,8136.44
$2N1251: D4.2 Q1.1 R15.2
$2N1356: D7.2 Q4.1 R18.2
$2N1706: D5.2 Q2.1 R16.2
$2N1723: D8.2 Q5.1 R19.2
$2N1987: D6.2 Q3.1 R17.2
$2N2004: D9.2 Q6.1 R20.2
$2N16058: D14.2 Q7.1 R32.2
$2N16063: D15.2 Q8.1 R33.2
$2N16067: D16.2 Q9.1 R34.2
$2N16072: D17.2 Q10.1 R35.2
$2N16077: D18.2 Q11.1 R36.2
$2N16082: D19.2 Q12.1 R37.2
ADC_VIN: C41.2 R49.2 R50.1 U5.18 | length 1420.3
  Top Layer w10: U5.18@8254.92,9038.24 8254.92,9219.76 8420.08,9384.92 v1(8482.08,9384.92) ; v1(8574.08,9384.92) 8804.08,9384.92 8962.08,9542.92 8962.08,9727.13 8919.54,9769.67 8919.54,9819.18 8919.12,9819.6 R50.1@8919.12,9860.92 R49.2@8919.12,9922.92
  Bottom Layer w10: v1(8482.08,9384.92) v1(8574.08,9384.92)
BOOT0: BOOT0.1 R6.2 U5.44 | length 276.4
  Top Layer w10: BOOT0.1@8248.73,8437.92 8248.73,8532.47 R6.2@8250.18,8533.92 8251.08,8534.82 8251.08,8645.46 8274.61,8668.99 U5.44@8274.61,8703.6
BS: C2.1 U3.1 | length 88.3
  Top Layer w15: C2.1@8280.08,9849.46 8348.9,9849.46 U3.1@8362.68,9835.68
CAN1_RX: U4.4 U5.45 | length 1224.9
  Top Layer w10: v1(8286.08,8647.92) 8294.29,8656.13 U5.45@8294.29,8703.6
  Top Layer w15: v1(8457.08,8649.92) 8548.08,8558.92 8548.08,8044.92 8592.08,8000.92 8670.08,8000.92 8795.16,8126.01 U4.4@8829.39,8126.01
  Bottom Layer w10: v1(8286.08,8647.92) 8455.08,8647.92 v1(8457.08,8649.92)
CAN1_TX: U4.1 U5.46 | length 1420.1
  Top Layer w10: U5.46@8313.98,8703.6 8313.98,8673.02 8314.08,8672.92 v1(8314.08,8624.92)
  Top Layer w15: v1(8458.08,8609.92) 8519.08,8548.92 8519.08,8031.92 8575.08,7975.92 8696.08,7975.92 8771.08,8050.92 v1(8853.08,8050.92) ; v1(8918.08,8049.92) 8973.08,8049.92 8980.08,8056.92 8980.08,8125.32 U4.1@8979.39,8126.01
  Bottom Layer w10: v1(8314.08,8624.92) 8443.08,8624.92 v1(8458.08,8609.92)
  Bottom Layer w15: v1(8853.08,8050.92) 8917.08,8050.92 v1(8918.08,8049.92)
CANH: CAN.2 R8.1 U4.7 | length 284
  Top Layer w15: CAN.2@8930.08,7822.54 8930.08,7914.09 U4.7@8929.39,7914.79 8929.39,7956.23 8942.08,7968.92 9014.08,7968.92 9033.04,7949.96 R8.1@9033.04,7916.66
CANL: CAN.3 R8.2 U4.6 | length 507.1
  Top Layer w15: U4.6@8879.39,7914.79 8879.39,7965.23 8917.08,8002.92 9038.08,8002.92 9067.12,7973.88 R8.2@9067.12,7916.66 9067.12,7846.96 9026.7,7806.54 CAN.3@8969.45,7806.54
EEPROM_SCL: IIC1.3 R9.1 U5.35 U6.6 U17.23 | length 1961.8
  Top Layer w10: 7326.45,8031.04 7370.34,8074.92 7799.08,8074.92 7987.08,8262.92 ; v1(7987.08,8296.92) 7987.08,8262.92 ; U17.23@8023.67,8136.44 8023.67,8224.52 v1(8041.08,8241.92) ; U5.35@8077.76,8782.34 8043.23,8782.34 8030.08,8769.19 8030.08,8305.92 7987.08,8262.92
  Top Layer w15: R9.1@7217.08,7990.96 7217.08,8035.92 7242.08,8060.92 7301.08,8060.92 7326.45,8035.55 7326.45,8031.04 U6.6@7326.45,7972.37 7326.45,7809.24 IIC1.3@7324.76,7807.55
  Bottom Layer w10: v1(7987.08,8296.92) 7987.08,8295.92 v1(8041.08,8241.92)
EEPROM_SDA: IIC1.4 R10.1 U5.36 U6.5 U17.24 | length 1821.1
  Top Layer w10: U6.5@7276.45,7972.37 7277.08,7973 v1(7277.08,8026.92) ; v1(7385.08,8041.92) 7803.08,8041.92 8003.99,8242.84 ; U17.24@8002.48,8134.92 U17.24@8003.99,8136.44 8003.99,8242.84 ; U5.36@8077.76,8762.65 8077.76,8316.6 8003.99,8242.84
  Top Layer w15: R10.1@7217.12,7900.92 v1(7276.08,7900.92) 7276.45,7901.3 U6.5@7276.45,7972.37 ; IIC1.4@7364.13,7807.55 7365.08,7808.49 v1(7365.08,7862.92)
  Bottom Layer w10: v1(7277.08,8026.92) 7370.08,8026.92 v1(7385.08,8041.92)
  Bottom Layer w15: v1(7276.08,7900.92) 7327.08,7900.92 v1(7365.08,7862.92)
FB: C1.2 R1.1 R2.2 U3.3 | length 294.2
  Top Layer w15: U3.3@8437.48,9835.68 8437.48,9776.99 R1.1@8440.54,9773.92 8562.08,9773.92 8572.08,9763.92 8598.54,9763.92 C1.2@8600.08,9762.38 8604.5,9757.96 R2.2@8665.08,9757.96
GND: C3.1 C4.1 C5.2 C6.1 C7.1 C8.1 C9.1 C10.1 C11.1 C12.2 C13.2 C14.1 C15.2 C16.1 C17.1 C21.1 C22.1 C23.2 C24.2 C25.1 C26.1 C27.1 C28.2 C29.2 C33.2 C34.2 C35.2 C36.2 C37.2 C38.2 C39.2 C40.2 C41.1 C42.2 C43.1 C44.2 C45.1 CAN.1 CAN.4 CAN.5 D10.1 IIC1.1 IIC1.5 IIC1.6 IIC2.1 IIC2.5 IIC2.6 LED1.1 NRST.2 Q6.3 Q12.3 R1.2 R4.1 R6.1 R21.1 R22.1 R24.2 R30.1 R39.2 R40.1 R41.1 R50.2 SWD.1 SWD.5 SWD.6 U3.2 U4.2 U4.8 U5.8 U5.23 U5.47 U6.1 U6.2 U6.3 U6.4 U6.7 U7.8 U8.2 U8.5 U9.2 U9.5 U11.8 U12.2 U12.5 U13.2 U13.5 U15.2 U16.1 U17.1 U17.9 U17.11 U17.18 U17.25 USART1.1 USART1.5 USART1.6 X2.2 | length 6063.3
  Top Layer w10: U17.1@7974.46,8106.91 8003.5,8106.91 v1(8037.48,8072.93) U17.25@8053.2,8057.21 ; C42.2@8040.62,7927.92 8043.36,7930.67 U17.9@8043.36,7978.96 8043.36,8047.37 U17.25@8053.2,8057.21 ; U17.11@8082.73,7978.96 8082.73,8027.68 v1(8070.48,8039.93) U17.25@8053.2,8057.21 ; C44.2@8184.69,8048.57 8184.69,8088.31 8166.4,8106.6 U17.18@8131.94,8106.6 8102.59,8106.6 U17.25@8053.2,8057.21 ; v1(8327.08,8928.92) 8327.08,8915.92 8342.55,8900.45 U5.8@8412.4,8900.45 8454.07,8900.45 8464.07,8910.45 8482.55,8910.45 8500.08,8892.92 8630.08,8892.92 8643.08,8879.92 8643.08,8863.37 C12.2@8642.54,8862.83 8642.54,8832.38 8626.08,8815.92 ; 8455.08,8808.92 8455.08,8768.92 8485.08,8738.92 8612.54,8738.92 C14.1@8642.54,8768.92 8642.54,8799.46 8626.08,8815.92 ; X2.2@8524.53,8815.92 8626.08,8815.92
  Top Layer w15: C45.1@7933.59,7927.92 7937.02,7924.49 SWD.1@7937.02,7806.55 ; U5.23@8156.5,9038.24 8156.5,8937.5 v1(8193.08,8900.92) ; U5.47@8333.66,8703.6 8333.66,8659.34 8345.08,8647.92 C6.1@8368.62,8647.92
  Top Layer w100: 9384.56,8381.44 9640.28,8125.72 C33.2@10240.08,8125.72
  Top Layer w120: Q12.3@7142.28,8559.02 7142.38,8558.92 7287.08,8558.92 7517.12,8788.97 R41.1@7517.12,9110.92 7517.12,9655.92 R40.1@7512.12,9660.92 7512.12,9841.92 ; C13.2@9260.07,9820.81 9266.19,9826.92 9324.08,9826.92 9343.03,9807.97 R21.1@9343.03,9485.92 R22.1@9343.03,8930.92 9343.03,8422.97 9384.56,8381.44 Q6.3@9710.47,8381.44
  other v1: 7978.08,7642.92 8011.08,7642.92 9525.08,7643.92 9558.08,7643.92 7287.08,7644.92 7320.08,7644.92 8418.08,7644.92 8451.08,7644.92 8916.08,7644.92 8949.08,7644.92 7978.08,7675.92 8011.08,7675.92 9525.08,7676.92 9558.08,7676.92 7287.08,7677.92 7320.08,7677.92 8418.08,7677.92 8451.08,7677.92 8916.08,7677.92 8949.08,7677.92 6661.08,7765.92 6694.08,7765.92 8219.08,7788.92 8252.08,7788.92 8804.08,7793.92 8837.08,7793.92 6661.08,7798.92 6694.08,7798.92 10089.08,7804.92 10122.08,7804.92 10238.08,7810.92 10271.08,7810.92 7685.08,7819.92 7718.08,7819.92 8219.08,7821.92 8252.08,7821.92 8804.08,7826.92 8837.08,7826.92 9157.08,7828.92 9190.08,7828.92 9009.08,7837.92 10089.08,7837.92 10122.08,7837.92 10238.08,7843.92 10271.08,7843.92 7685.08,7852.92 7718.08,7852.92 7414.08,7855.92 7447.08,7855.92 9157.08,7861.92 9190.08,7861.92 6705.08,7872.92 6738.08,7872.92 9034.08,7876.92 6575.08,7877.92 6608.08,7877.92 8652.08,7880.92 8685.08,7880.92 8252.08,7884.92 8285.08,7884.92 7414.08,7888.92 7447.08,7888.92 6705.08,7905.92 6738.08,7905.92 6575.08,7910.92 6608.08,7910.92 8652.08,7913.92 8685.08,7913.92 8252.08,7917.92 8285.08,7917.92 10280.08,7927.92 10313.08,7927.92 10087.08,7929.92 10120.08,7929.92 7671.08,7955.92 7704.08,7955.92 10280.08,7960.92 10313.08,7960.92 10087.08,7962.92 10120.08,7962.92 9256.08,7980.92 9289.08,7980.92 9117.08,7984.92 9150.08,7984.92 7671.08,7988.92 7704.08,7988.92 7871.08,7989.92 7904.08,7989.92 9754.08,8011.92 9787.08,8011.92 9256.08,8013.92 9289.08,8013.92 9667.08,8013.92 9700.08,8013.92 9117.08,8017.92 9150.08,8017.92 7871.08,8022.92 7904.08,8022.92 8037.48,8039.93 9754.08,8044.92 9787.08,8044.92 9667.08,8046.92 9700.08,8046.92 8070.48,8072.93 8201.08,8123.92 8234.08,8123.92 8201.08,8156.92 8234.08,8156.92 7184.08,8165.92 7217.08,8165.92 9315.08,8172.92 9348.08,8172.92 9164.08,8191.92 9197.08,8191.92 7184.08,8198.92 7217.08,8198.92 9315.08,8205.92 9348.08,8205.92 9164.08,8224.92 9197.08,8224.92 8728.08,8229.92 8761.08,8229.92 7500.08,8245.92 7533.08,8245.92 8112.08,8248.92 8145.08,8248.92 8728.08,8262.92 8761.08,8262.92 7500.08,8278.92 7533.08,8278.92 8112.08,8281.92 8145.08,8281.92 7158.08,8437.92 7191.08,8437.92 7223.08,8473.92 7256.08,8473.92 9223.08,8515.92 9256.08,8515.92 8680.08,8528.92 8713.08,8528.92 9223.08,8548.92 9256.08,8548.92 8323.08,8553.92 8680.08,8561.92 8713.08,8561.92 9131.08,8598.92 8637.08,8649.92 8670.08,8649.92 8894.08,8657.92 8927.08,8657.92 8637.08,8682.92 8670.08,8682.92 8894.08,8690.92 8927.08,8690.92 7294.08,8722.92 7327.08,8722.92 7294.08,8755.92 7327.08,8755.92 8162.08,8772.92 8224.08,8837.92 8348.62,8870.92 8294.08,8928.92 8294.08,8961.92 8327.08,8961.92 7657.08,8998.92 7690.08,8998.92 7854.08,8998.92 7887.08,8998.92 7657.08,9031.92 7690.08,9031.92 7854.08,9031.92 7887.08,9031.92 7659.08,9104.92 7692.08,9104.92 9046.08,9115.92 9079.08,9115.92 8867.08,9134.92 8900.08,9134.92 7659.08,9137.92 7692.08,9137.92 8610.08,9150.92 7895.08,9177.92 7928.08,9177.92 8610.08,9183.92 9123.08,9186.92 7895.08,9210.92 7928.08,9210.92 8960.22,9276.14 8593.08,9283.92 8626.08,9283.92 9102.08,9296.92 8593.08,9316.92 8626.08,9316.92 7853.08,9320.92 8970.08,9402.92 9003.08,9402.92 9036.08,9402.92 9069.08,9402.92 9421.08,9403.92 9454.08,9403.92 7694.08,9412.92 9421.08,9436.92 9454.08,9436.92 7904.08,9543.92 7937.08,9543.92 7904.08,9576.92 7937.08,9576.92 8632.08,9591.92 8665.08,9591.92 9168.08,9594.92 9201.08,9594.92 7695.08,9619.92 7728.08,9619.92 8632.08,9624.92 8665.08,9624.92 9168.08,9627.92 9201.08,9627.92 7695.08,9652.92 7728.08,9652.92 7390.08,9667.86 7423.08,9667.86 7390.08,9700.86 7423.08,9700.86 6737.08,9760.92 6770.08,9760.92 7776.08,9786.92 7809.08,9786.92 6737.08,9793.92 6770.08,9793.92 8672.08,9798.92 8705.08,9798.92 7776.08,9819.92 7809.08,9819.92 6865.08,9820.92 6898.08,9820.92 8672.08,9831.92 8705.08,9831.92 9062.08,9836.92 9095.08,9836.92 6865.08,9853.92 6898.08,9853.92 9608.08,9853.92 9641.08,9853.92 9474.08,9859.92 9507.08,9859.92 9062.08,9869.92 9095.08,9869.92 9608.08,9886.92 9641.08,9886.92 9474.08,9892.92 9507.08,9892.92 7926.08,9979.92 7959.08,9979.92 7926.08,10012.92 7959.08,10012.92 8152.08,10018.92 8185.08,10018.92 8152.08,10051.92 8185.08,10051.92 6779.08,10070.92 6812.08,10070.92 6779.08,10103.92 6812.08,10103.92 7193.08,10114.92 7226.08,10114.92 10240.08,10126.92 10273.08,10126.92 7379.08,10132.92 7412.08,10132.92 7193.08,10147.92 7226.08,10147.92 10240.08,10159.92 10273.08,10159.92 7379.08,10165.92 7412.08,10165.92 9605.08,10181.92 9638.08,10181.92 9419.08,10183.92 9452.08,10183.92 8820.08,10189.92 8853.08,10189.92 9204.08,10189.92 9237.08,10189.92 8991.08,10190.92 9024.08,10190.92 10083.08,10190.92 10116.08,10190.92 6690.08,10207.92 6723.08,10207.92 9605.08,10214.92 9638.08,10214.92 9419.08,10216.92 9452.08,10216.92 8820.08,10222.92 8853.08,10222.92 9204.08,10222.92 9237.08,10222.92 8991.08,10223.92 9024.08,10223.92 10083.08,10223.92 10116.08,10223.92 7617.08,10229.92 7650.08,10229.92 6690.08,10240.92 6723.08,10240.92 7262.08,10243.92 7295.08,10243.92 7617.08,10262.92 7650.08,10262.92 7262.08,10276.92 7295.08,10276.92
M0_HO1: D4.1 R15.1 U7.19 | length 1936.5
  Top Layer w15: v1(8977.08,8815.92) 8978.66,8814.34 U7.19@8978.66,8749.22 ; v1(8994.08,8897.92) 8994.08,8966.92 9019.08,8991.92 9199.08,8991.92 9233.08,9025.92 9233.08,9458.92 v1(9232.08,9459.92) ; v1(9426.08,9508.92) 9511.08,9593.92 9771.08,9593.92 9812.04,9634.88 R15.1@9812.04,9855.92 9761.08,9855.92 9751.77,9865.23 D4.1@9751.77,9940.92
  Bottom Layer w15: v1(8977.08,8815.92) 8977.08,8880.92 v1(8994.08,8897.92) ; v1(9232.08,9459.92) 9377.08,9459.92 v1(9426.08,9508.92)